# EAGLE board panel (EAGLE 9.2.2), part 1 of 2
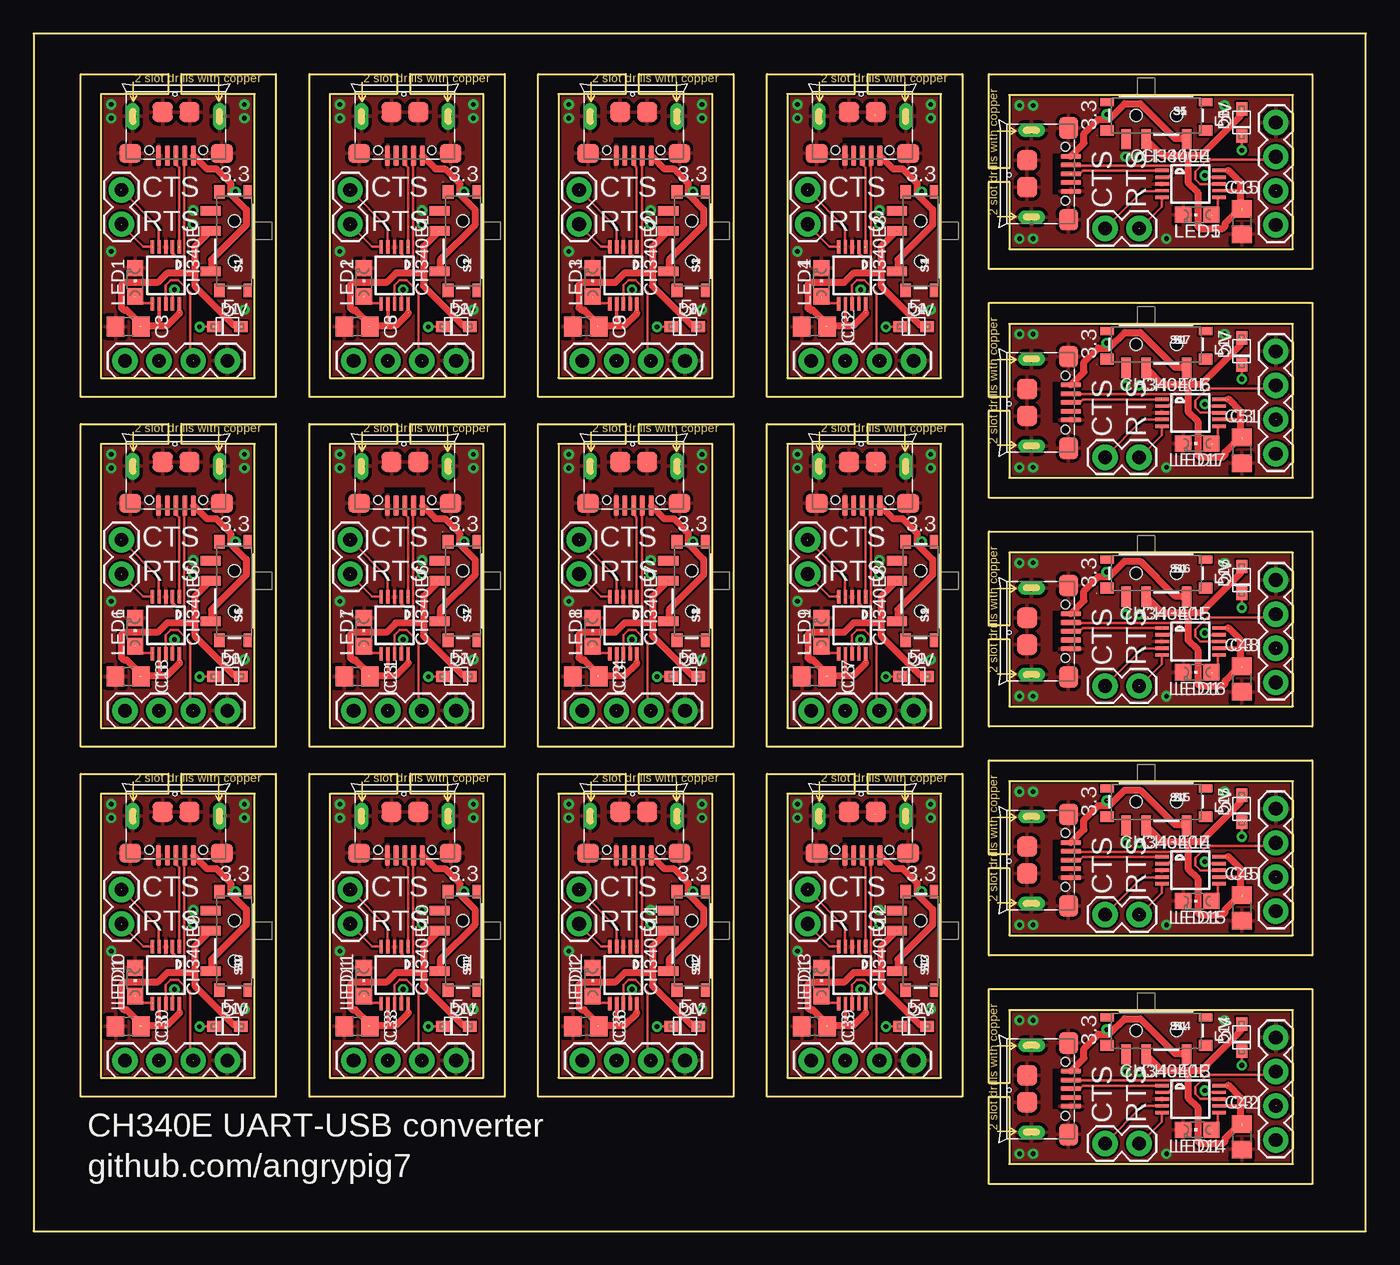
[diagram p0: board, top side]
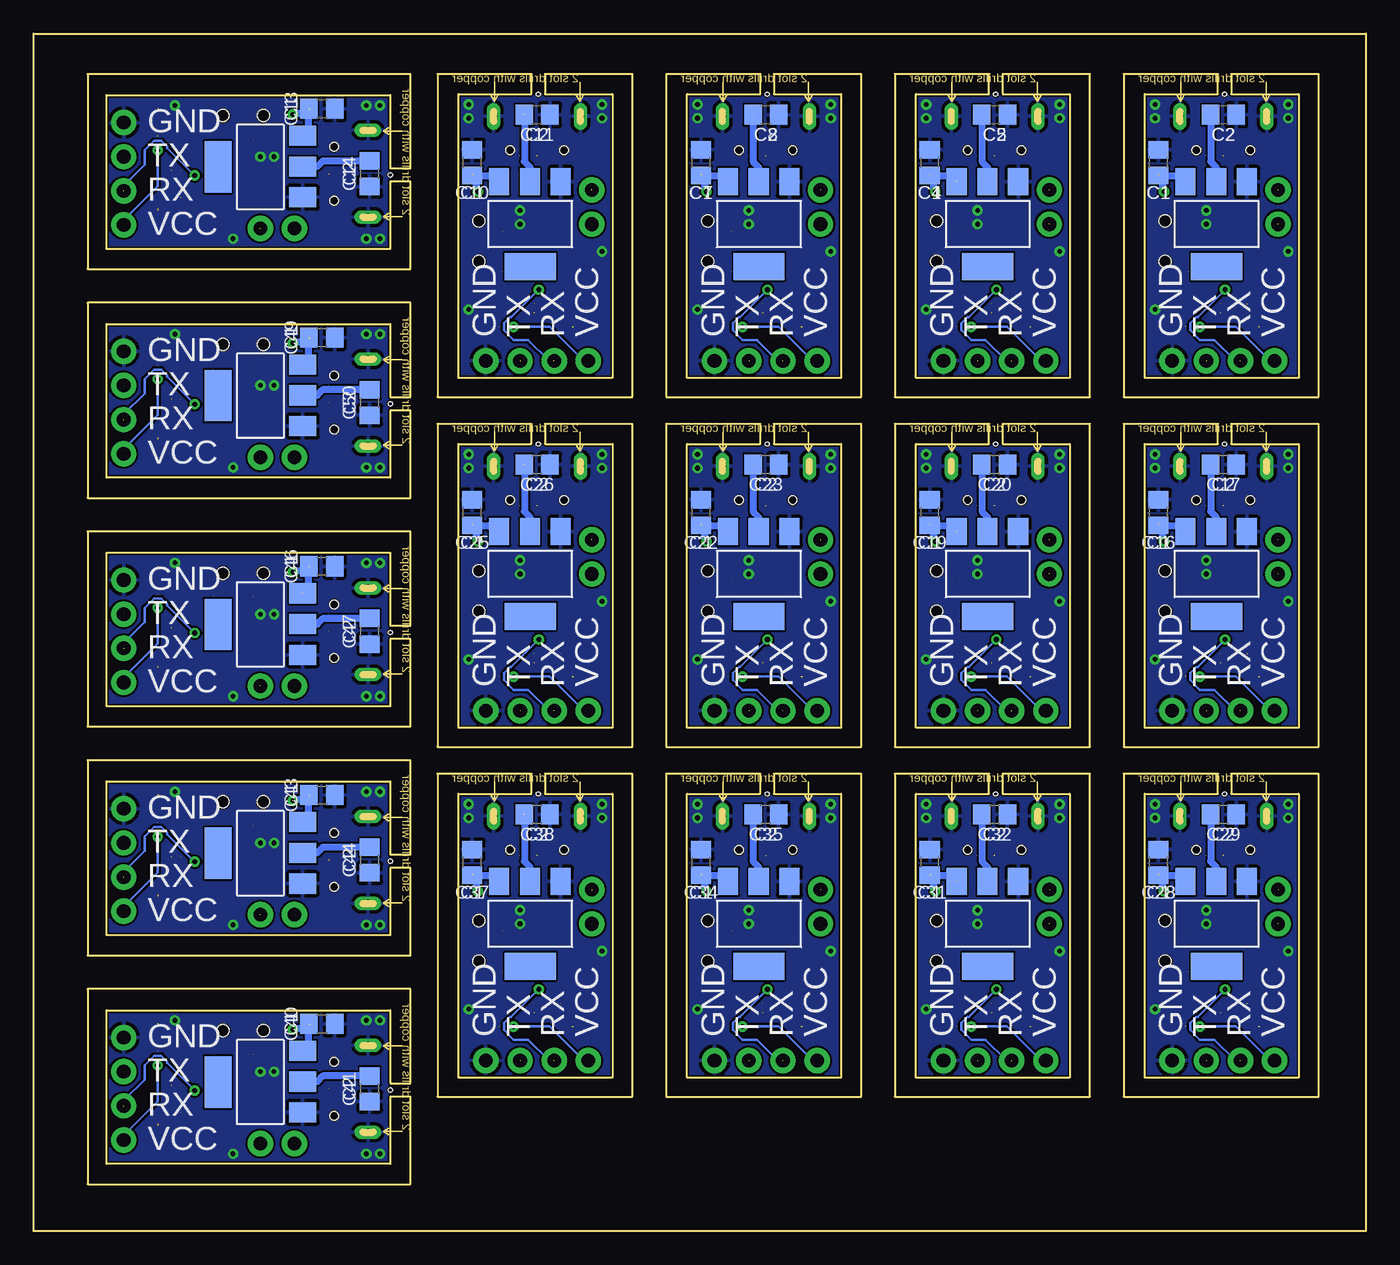
[diagram p1: board, bottom side, seen from below]

Size 99 x 89 mm. Coordinates in mm from the lower left corner, seen from the top.
Outline: 5,84.5 5,63.42 16.43,63.42 16.43,84.5 11,84.5 11,86 18,86 18,62 3.5,62 3.5,86 10,86 10,84.5 5,84.5
Outline: 0,0 99,0 99,89 0,89 0,0
Outline: 22,84.5 22,63.42 33.43,63.42 33.43,84.5 28,84.5 28,86 35,86 35,62 20.5,62 20.5,86 27,86 27,84.5 22,84.5
Outline: 39,84.5 39,63.42 50.43,63.42 50.43,84.5 45,84.5 45,86 52,86 52,62 37.5,62 37.5,86 44,86 44,84.5 39,84.5
Outline: 56,84.5 56,63.42 67.43,63.42 67.43,84.5 62,84.5 62,86 69,86 69,62 54.5,62 54.5,86 61,86 61,84.5 56,84.5
Outline: 72.5,73 93.58,73 93.58,84.43 72.5,84.43 72.5,79 71,79 71,86 95,86 95,71.5 71,71.5 71,78 72.5,78 72.5,73
Outline: 5,58.5 5,37.42 16.43,37.42 16.43,58.5 11,58.5 11,60 18,60 18,36 3.5,36 3.5,60 10,60 10,58.5 5,58.5
Outline: 22,58.5 22,37.42 33.43,37.42 33.43,58.5 28,58.5 28,60 35,60 35,36 20.5,36 20.5,60 27,60 27,58.5 22,58.5
Outline: 39,58.5 39,37.42 50.43,37.42 50.43,58.5 45,58.5 45,60 52,60 52,36 37.5,36 37.5,60 44,60 44,58.5 39,58.5
Outline: 56,58.5 56,37.42 67.43,37.42 67.43,58.5 62,58.5 62,60 69,60 69,36 54.5,36 54.5,60 61,60 61,58.5 56,58.5
Outline: 5,32.5 5,11.42 16.43,11.42 16.43,32.5 11,32.5 11,34 18,34 18,10 3.5,10 3.5,34 10,34 10,32.5 5,32.5
Outline: 22,32.5 22,11.42 33.43,11.42 33.43,32.5 28,32.5 28,34 35,34 35,10 20.5,10 20.5,34 27,34 27,32.5 22,32.5
Outline: 39,32.5 39,11.42 50.43,11.42 50.43,32.5 45,32.5 45,34 52,34 52,10 37.5,10 37.5,34 44,34 44,32.5 39,32.5
Outline: 56,32.5 56,11.42 67.43,11.42 67.43,32.5 62,32.5 62,34 69,34 69,10 54.5,10 54.5,34 61,34 61,32.5 56,32.5
Outline: 72.5,5 93.58,5 93.58,16.43 72.5,16.43 72.5,11 71,11 71,18 95,18 95,3.5 71,3.5 71,10 72.5,10 72.5,5
Outline: 72.5,22 93.58,22 93.58,33.43 72.5,33.43 72.5,28 71,28 71,35 95,35 95,20.5 71,20.5 71,27 72.5,27 72.5,22
Outline: 72.5,39 93.58,39 93.58,50.43 72.5,50.43 72.5,45 71,45 71,52 95,52 95,37.5 71,37.5 71,44 72.5,44 72.5,39
Outline: 72.5,56 93.58,56 93.58,67.43 72.5,67.43 72.5,62 71,62 71,69 95,69 95,54.5 71,54.5 71,61 72.5,61 72.5,56
Copper layers (1*16): Top 0.035mm / dielectric 1.5mm / Bottom 0.035mm
Design rules "default *": minimum track width 6mil, minimum drill 0.35mm, track to track 6mil, track to pad 6mil, pad to pad 6mil, via to via 6mil, smd to smd 6mil, copper to edge 4mil, drill to drill 6mil, minimum pad ring 10mil, minimum via ring 8mil, stop-mask expansion 4mil, vias tented up to drill 0mil, thermal gap 10mil
Net classes: 0 default: width 0.203 mm; 1 power: width 0.508 mm
Holes 0.3 mm at 10.5,84.5 27.5,84.5 44.5,84.5 61.5,84.5 72.5,78.5 10.5,58.5 27.5,58.5 44.5,58.5 61.5,58.5 10.5,32.5 27.5,32.5 44.5,32.5 61.5,32.5 72.5,10.5 72.5,27.5 72.5,44.5 72.5,61.5

## Footprints (pad centres in the part's own frame; a part is rotated, then mirrored left to right if it is on the bottom)
C0805 = smd 1.3 x 1.5: 1 -0.95,0; 2 0.95,0
MSOP10 = smd 1 x 0.25: 1 -2.113,1; 2 -2.113,0.5; 3 -2.113,0; 4 -2.113,-0.5; 5 -2.113,-1; 6 2.113,-1; 7 2.113,-0.5; 8 2.113,0; 9 2.113,0.5; 10 2.113,1
SOD-323F = smd 1 x 0.8: A -1,0; C 1,0
SOT223 = smd 1.499 x 2.007: 1 -2.261,-3.15; 2 0.025,-3.15; 3 2.311,-3.15 | smd 3.81 x 2.007: 4 0,3.15
1X04 = drill 1.016 pad 1.88: 1 0,0; 2 2.54,0; 3 5.08,0; 4 7.62,0
1X02 = drill 1.016 pad 1.88: 1 0,0; 2 2.54,0
CHIPLED_0805 = smd 1.2 x 1.2: A 0,-1.05; C 0,1.05
SWITCH_SPST_SMD_A = smd 0.7 x 1.5: 1 -2.25,-1.75; 2 -0.75,-1.75; 3 2.25,-1.75 | smd 1 x 0.6: GND1 -3.65,1; GND3 3.65,1 | smd 1 x 0.8: GND2 -3.65,-1.1; GND4 3.65,-1.1 | hole 0.9: -1.5,0; 1.5,0
MICRO-USB5+4P-SMD-0.65-B = smd 0.381 x 1.524: 1 -1.3,-0.25; 2 -0.65,-0.25; 3 0,-0.25; 4 0.65,-0.25; 5 1.3,-0.25 | smd 1.6 x 1.397: S1 -3.4,-0.427; S6 3.4,-0.427 | drill 0.508 pad 1.016 long: S2 -3.226,-3.175; S5 3.226,-3.175 | smd 1.5 x 1.5: S3 -1,-3.5; S4 1,-3.5 | hole 0.635: -2,-0.65; 2,-0.65

## Placement (x,y rotation side)
C1  100nF  [C0805]  15.41,79.42 90 bottom
C2  100nF  [C0805]  10.59,82.98 0 bottom
C3  100nF  [C0805]  7.03,67.23 180 top
C4  100nF  [C0805]  32.41,79.42 90 bottom
C5  100nF  [C0805]  27.59,82.98 0 bottom
C6  100nF  [C0805]  24.03,67.23 180 top
C7  100nF  [C0805]  49.41,79.42 90 bottom
C8  100nF  [C0805]  44.59,82.98 0 bottom
C9  100nF  [C0805]  41.03,67.23 180 top
C10  100nF  [C0805]  66.41,79.42 90 bottom
C11  100nF  [C0805]  61.59,82.98 0 bottom
C12  100nF  [C0805]  58.03,67.23 180 top
C13  100nF  [C0805]  77.58,83.41 0 bottom
C14  100nF  [C0805]  74.02,78.59 270 bottom
C15  100nF  [C0805]  89.77,75.03 270 top
C16  100nF  [C0805]  15.41,53.42 90 bottom
C17  100nF  [C0805]  10.59,56.98 0 bottom
C18  100nF  [C0805]  7.03,41.23 180 top
C19  100nF  [C0805]  32.41,53.42 90 bottom
C20  100nF  [C0805]  27.59,56.98 0 bottom
C21  100nF  [C0805]  24.03,41.23 180 top
C22  100nF  [C0805]  49.41,53.42 90 bottom
C23  100nF  [C0805]  44.59,56.98 0 bottom
C24  100nF  [C0805]  41.03,41.23 180 top
C25  100nF  [C0805]  66.41,53.42 90 bottom
C26  100nF  [C0805]  61.59,56.98 0 bottom
C27  100nF  [C0805]  58.03,41.23 180 top
C28  100nF  [C0805]  15.41,27.42 90 bottom
C29  100nF  [C0805]  10.59,30.98 0 bottom
C30  100nF  [C0805]  7.03,15.23 180 top
C31  100nF  [C0805]  32.41,27.42 90 bottom
C32  100nF  [C0805]  27.59,30.98 0 bottom
C33  100nF  [C0805]  24.03,15.23 180 top
C34  100nF  [C0805]  49.41,27.42 90 bottom
C35  100nF  [C0805]  44.59,30.98 0 bottom
C36  100nF  [C0805]  41.03,15.23 180 top
C37  100nF  [C0805]  66.41,27.42 90 bottom
C38  100nF  [C0805]  61.59,30.98 0 bottom
C39  100nF  [C0805]  58.03,15.23 180 top
C40  100nF  [C0805]  77.58,15.41 0 bottom
C41  100nF  [C0805]  74.02,10.59 270 bottom
C42  100nF  [C0805]  89.77,7.03 270 top
C43  100nF  [C0805]  77.58,32.41 0 bottom
C44  100nF  [C0805]  74.02,27.59 270 bottom
C45  100nF  [C0805]  89.77,24.03 270 top
C46  100nF  [C0805]  77.58,49.41 0 bottom
C47  100nF  [C0805]  74.02,44.59 270 bottom
C48  100nF  [C0805]  89.77,41.03 270 top
C49  100nF  [C0805]  77.58,66.41 0 bottom
C50  100nF  [C0805]  74.02,61.59 270 bottom
C51  100nF  [C0805]  89.77,58.03 270 top
CH340E  CH340ESMD  [MSOP10]  9.83,71.04 270 top
CH340E1  CH340ESMD  [MSOP10]  26.83,71.04 270 top
CH340E2  CH340ESMD  [MSOP10]  43.83,71.04 270 top
CH340E3  CH340ESMD  [MSOP10]  60.83,71.04 270 top
CH340E4  CH340ESMD  [MSOP10]  85.96,77.83 0 top
CH340E5  CH340ESMD  [MSOP10]  9.83,45.04 270 top
CH340E6  CH340ESMD  [MSOP10]  26.83,45.04 270 top
CH340E7  CH340ESMD  [MSOP10]  43.83,45.04 270 top
CH340E8  CH340ESMD  [MSOP10]  60.83,45.04 270 top
CH340E9  CH340ESMD  [MSOP10]  9.83,19.04 270 top
CH340E10  CH340ESMD  [MSOP10]  26.83,19.04 270 top
CH340E11  CH340ESMD  [MSOP10]  43.83,19.04 270 top
CH340E12  CH340ESMD  [MSOP10]  60.83,19.04 270 top
CH340E13  CH340ESMD  [MSOP10]  85.96,9.83 0 top
CH340E14  CH340ESMD  [MSOP10]  85.96,26.83 0 top
CH340E15  CH340ESMD  [MSOP10]  85.96,43.83 0 top
CH340E16  CH340ESMD  [MSOP10]  85.96,60.83 0 top
D1  [SOD-323F]  14.4,67.23 180 top
D2  [SOD-323F]  31.4,67.23 180 top
D3  [SOD-323F]  48.4,67.23 180 top
D4  [SOD-323F]  65.4,67.23 180 top
D5  [SOD-323F]  89.77,82.4 270 top
D6  [SOD-323F]  14.4,41.23 180 top
D7  [SOD-323F]  31.4,41.23 180 top
D8  [SOD-323F]  48.4,41.23 180 top
D9  [SOD-323F]  65.4,41.23 180 top
D10  [SOD-323F]  14.4,15.23 180 top
D11  [SOD-323F]  31.4,15.23 180 top
D12  [SOD-323F]  48.4,15.23 180 top
D13  [SOD-323F]  65.4,15.23 180 top
D14  [SOD-323F]  89.77,14.4 270 top
D15  [SOD-323F]  89.77,31.4 270 top
D16  [SOD-323F]  89.77,48.4 270 top
D17  [SOD-323F]  89.77,65.4 270 top
IC1  REG1117  [SOT223]  11.1,74.85 180 bottom
IC2  REG1117  [SOT223]  28.1,74.85 180 bottom
IC3  REG1117  [SOT223]  45.1,74.85 180 bottom
IC4  REG1117  [SOT223]  62.1,74.85 180 bottom
IC5  REG1117  [SOT223]  82.15,79.1 90 bottom
IC6  REG1117  [SOT223]  11.1,48.85 180 bottom
IC7  REG1117  [SOT223]  28.1,48.85 180 bottom
IC8  REG1117  [SOT223]  45.1,48.85 180 bottom
IC9  REG1117  [SOT223]  62.1,48.85 180 bottom
IC10  REG1117  [SOT223]  11.1,22.85 180 bottom
IC11  REG1117  [SOT223]  28.1,22.85 180 bottom
IC12  REG1117  [SOT223]  45.1,22.85 180 bottom
IC13  REG1117  [SOT223]  62.1,22.85 180 bottom
IC14  REG1117  [SOT223]  82.15,11.1 90 bottom
IC15  REG1117  [SOT223]  82.15,28.1 90 bottom
IC16  REG1117  [SOT223]  82.15,45.1 90 bottom
IC17  REG1117  [SOT223]  82.15,62.1 90 bottom
J1  [1X04]  6.78,64.69 0 top
J2  [1X02]  6.52,74.85 90 top
J3  [1X04]  23.78,64.69 0 top
J4  [1X02]  23.52,74.85 90 top
J5  [1X04]  40.78,64.69 0 top
J6  [1X02]  40.52,74.85 90 top
J7  [1X04]  57.78,64.69 0 top
J8  [1X02]  57.52,74.85 90 top
J9  [1X04]  92.31,74.78 90 top
J10  [1X02]  82.15,74.52 180 top
J11  [1X04]  6.78,38.69 0 top
J12  [1X02]  6.52,48.85 90 top
J13  [1X04]  23.78,38.69 0 top
J14  [1X02]  23.52,48.85 90 top
J15  [1X04]  40.78,38.69 0 top
J16  [1X02]  40.52,48.85 90 top
J17  [1X04]  57.78,38.69 0 top
J18  [1X02]  57.52,48.85 90 top
J19  [1X04]  6.78,12.69 0 top
J20  [1X02]  6.52,22.85 90 top
J21  [1X04]  23.78,12.69 0 top
J22  [1X02]  23.52,22.85 90 top
J23  [1X04]  40.78,12.69 0 top
J24  [1X02]  40.52,22.85 90 top
J25  [1X04]  57.78,12.69 0 top
J26  [1X02]  57.52,22.85 90 top
J27  [1X04]  92.31,6.78 90 top
J28  [1X02]  82.15,6.52 180 top
J29  [1X04]  92.31,23.78 90 top
J30  [1X02]  82.15,23.52 180 top
J31  [1X04]  92.31,40.78 90 top
J32  [1X02]  82.15,40.52 180 top
J33  [1X04]  92.31,57.78 90 top
J34  [1X02]  82.15,57.52 180 top
LED1  [CHIPLED_0805]  7.54,70.53 0 top
LED2  [CHIPLED_0805]  24.54,70.53 0 top
LED3  [CHIPLED_0805]  41.54,70.53 0 top
LED4  [CHIPLED_0805]  58.54,70.53 0 top
LED5  [CHIPLED_0805]  86.47,75.54 90 top
LED6  [CHIPLED_0805]  7.54,44.53 0 top
LED7  [CHIPLED_0805]  24.54,44.53 0 top
LED8  [CHIPLED_0805]  41.54,44.53 0 top
LED9  [CHIPLED_0805]  58.54,44.53 0 top
LED10  [CHIPLED_0805]  7.54,18.53 0 top
LED11  [CHIPLED_0805]  24.54,18.53 0 top
LED12  [CHIPLED_0805]  41.54,18.53 0 top
LED13  [CHIPLED_0805]  58.54,18.53 0 top
LED14  [CHIPLED_0805]  86.47,7.54 90 top
LED15  [CHIPLED_0805]  86.47,24.54 90 top
LED16  [CHIPLED_0805]  86.47,41.54 90 top
LED17  [CHIPLED_0805]  86.47,58.54 90 top
S1  [SWITCH_SPST_SMD_A]  14.91,73.58 270 top
S2  [SWITCH_SPST_SMD_A]  31.91,73.58 270 top
S3  [SWITCH_SPST_SMD_A]  48.91,73.58 270 top
S4  [SWITCH_SPST_SMD_A]  65.91,73.58 270 top
S5  [SWITCH_SPST_SMD_A]  83.42,82.91 0 top
S6  [SWITCH_SPST_SMD_A]  14.91,47.58 270 top
S7  [SWITCH_SPST_SMD_A]  31.91,47.58 270 top
S8  [SWITCH_SPST_SMD_A]  48.91,47.58 270 top
S9  [SWITCH_SPST_SMD_A]  65.91,47.58 270 top
S10  [SWITCH_SPST_SMD_A]  14.91,21.58 270 top
S11  [SWITCH_SPST_SMD_A]  31.91,21.58 270 top
S12  [SWITCH_SPST_SMD_A]  48.91,21.58 270 top
S13  [SWITCH_SPST_SMD_A]  65.91,21.58 270 top
S14  [SWITCH_SPST_SMD_A]  83.42,14.91 0 top
S15  [SWITCH_SPST_SMD_A]  83.42,31.91 0 top
S16  [SWITCH_SPST_SMD_A]  83.42,48.91 0 top
S17  [SWITCH_SPST_SMD_A]  83.42,65.91 0 top
USB1  ST-USB-001G  [MICRO-USB5+4P-SMD-0.65-B]  27.59,79.67 180 top
USB2  ST-USB-001G  [MICRO-USB5+4P-SMD-0.65-B]  10.59,79.67 180 top
USB3  ST-USB-001G  [MICRO-USB5+4P-SMD-0.65-B]  44.59,79.67 180 top
USB4  ST-USB-001G  [MICRO-USB5+4P-SMD-0.65-B]  61.59,79.67 180 top
USB5  ST-USB-001G  [MICRO-USB5+4P-SMD-0.65-B]  77.33,78.59 270 top
USB6  ST-USB-001G  [MICRO-USB5+4P-SMD-0.65-B]  10.59,53.67 180 top
USB7  ST-USB-001G  [MICRO-USB5+4P-SMD-0.65-B]  27.59,53.67 180 top
USB8  ST-USB-001G  [MICRO-USB5+4P-SMD-0.65-B]  44.59,53.67 180 top
USB9  ST-USB-001G  [MICRO-USB5+4P-SMD-0.65-B]  61.59,53.67 180 top
USB10  ST-USB-001G  [MICRO-USB5+4P-SMD-0.65-B]  10.59,27.67 180 top
USB11  ST-USB-001G  [MICRO-USB5+4P-SMD-0.65-B]  27.59,27.67 180 top
USB12  ST-USB-001G  [MICRO-USB5+4P-SMD-0.65-B]  44.59,27.67 180 top
USB13  ST-USB-001G  [MICRO-USB5+4P-SMD-0.65-B]  61.59,27.67 180 top
USB14  ST-USB-001G  [MICRO-USB5+4P-SMD-0.65-B]  77.33,10.59 270 top
USB15  ST-USB-001G  [MICRO-USB5+4P-SMD-0.65-B]  77.33,27.59 270 top
USB16  ST-USB-001G  [MICRO-USB5+4P-SMD-0.65-B]  77.33,44.59 270 top
USB17  ST-USB-001G  [MICRO-USB5+4P-SMD-0.65-B]  77.33,61.59 270 top

## Library data of the parts
C1-C51 = rcl-2
CH340E CH340E1-CH340E16 = CH340E
D1-D17 LED1-LED17 = adafruit
IC1-IC17 = burr-brown-3
J1 J3 J5 J7 J9 J11 J13 J15 J17 J19 J21 J23 J25 J27 J29 J31 J33 = SparkFun-Connectors; PROD_ID: CONN-09696
J2 J4 J6 J8 J10 J12 J14 J16 J18 J20 J22 J24 J26 J28 J30 J32 J34 = SparkFun-Connectors
S1-S17 = SparkFun-Switches; PROD_ID: SWCH-10651; SF_SKU: COM-10860
USB1-USB17 = Seeed-Connector; MPN: ST-USB-001G

## Nets
3.3V [power]: S1.1
3.3V1 [power]: S2.1
3.3V2 [power]: S3.1
3.3V3 [power]: S4.1
3.3V4 [power]: S5.1
3.3V5 [power]: S6.1
3.3V6 [power]: S7.1
3.3V7 [power]: S8.1
3.3V8 [power]: S9.1
3.3V9 [power]: S10.1
3.3V10 [power]: S11.1
3.3V11 [power]: S12.1
3.3V12 [power]: S13.1
3.3V13 [power]: S14.1
3.3V14 [power]: S15.1
3.3V15 [power]: S16.1
3.3V16 [power]: S17.1
3V1 [power]: C5.1 IC2.2
3V2 [power]: C8.1 IC3.2
3V3 [power]: C2.1 IC1.2
3V4 [power]: C11.1 IC4.2
3V5 [power]: C14.1 IC5.2
3V6 [power]: C17.1 IC6.2
3V7 [power]: C20.1 IC7.2
3V8 [power]: C23.1 IC8.2
3V9 [power]: C26.1 IC9.2
3V10 [power]: C29.1 IC10.2
3V11 [power]: C32.1 IC11.2
3V12 [power]: C35.1 IC12.2
3V13 [power]: C38.1 IC13.2
3V14 [power]: C41.1 IC14.2
3V15 [power]: C44.1 IC15.2
3V16 [power]: C47.1 IC16.2
3V17 [power]: C50.1 IC17.2
5V [power]: C1.1 IC1.3 S1.3 USB2.1
5V1 [power]: C4.1 IC2.3 S2.3 USB1.1
5V2 [power]: C7.1 IC3.3 S3.3 USB3.1
5V3 [power]: C10.1 IC4.3 S4.3 USB4.1
5V4 [power]: C13.1 IC5.3 S5.3 USB5.1
5V5 [power]: C16.1 IC6.3 S6.3 USB6.1
5V6 [power]: C19.1 IC7.3 S7.3 USB7.1
5V7 [power]: C22.1 IC8.3 S8.3 USB8.1
5V8 [power]: C25.1 IC9.3 S9.3 USB9.1
5V9 [power]: C28.1 IC10.3 S10.3 USB10.1
5V10 [power]: C31.1 IC11.3 S11.3 USB11.1
5V11 [power]: C34.1 IC12.3 S12.3 USB12.1
5V12 [power]: C37.1 IC13.3 S13.3 USB13.1
5V13 [power]: C40.1 IC14.3 S14.3 USB14.1
5V14 [power]: C43.1 IC15.3 S15.3 USB15.1
5V15 [power]: C46.1 IC16.3 S16.3 USB16.1
5V16 [power]: C49.1 IC17.3 S17.3 USB17.1
CTS: CH340E.5 J2.1
CTS1: CH340E1.5 J4.1
CTS2: CH340E2.5 J6.1
CTS3: CH340E3.5 J8.1
CTS4: CH340E4.5 J10.1
CTS5: CH340E5.5 J12.1
CTS6: CH340E6.5 J14.1
CTS7: CH340E7.5 J16.1
CTS8: CH340E8.5 J18.1
CTS9: CH340E9.5 J20.1
CTS10: CH340E10.5 J22.1
CTS11: CH340E11.5 J24.1
CTS12: CH340E12.5 J26.1
CTS13: CH340E13.5 J28.1
CTS14: CH340E14.5 J30.1
CTS15: CH340E15.5 J32.1
CTS16: CH340E16.5 J34.1
GND [power]: C1.2 C2.2 C3.2 CH340E.3 IC1.1 J1.4 LED1.C USB2.5 USB2.S1 USB2.S2 USB2.S3 USB2.S4 USB2.S5 USB2.S6
GND1 [power]: C4.2 C5.2 C6.2 CH340E1.3 IC2.1 J3.4 LED2.C USB1.5 USB1.S1 USB1.S2 USB1.S3 USB1.S4 USB1.S5 USB1.S6
GND2 [power]: C7.2 C8.2 C9.2 CH340E2.3 IC3.1 J5.4 LED3.C USB3.5 USB3.S1 USB3.S2 USB3.S3 USB3.S4 USB3.S5 USB3.S6
GND3 [power]: C10.2 C11.2 C12.2 CH340E3.3 IC4.1 J7.4 LED4.C USB4.5 USB4.S1 USB4.S2 USB4.S3 USB4.S4 USB4.S5 USB4.S6
GND4 [power]: C13.2 C14.2 C15.2 CH340E4.3 IC5.1 J9.4 LED5.C USB5.5 USB5.S1 USB5.S2 USB5.S3 USB5.S4 USB5.S5 USB5.S6
GND5 [power]: C16.2 C17.2 C18.2 CH340E5.3 IC6.1 J11.4 LED6.C USB6.5 USB6.S1 USB6.S2 USB6.S3 USB6.S4 USB6.S5 USB6.S6
GND6 [power]: C19.2 C20.2 C21.2 CH340E6.3 IC7.1 J13.4 LED7.C USB7.5 USB7.S1 USB7.S2 USB7.S3 USB7.S4 USB7.S5 USB7.S6
GND7 [power]: C22.2 C23.2 C24.2 CH340E7.3 IC8.1 J15.4 LED8.C USB8.5 USB8.S1 USB8.S2 USB8.S3 USB8.S4 USB8.S5 USB8.S6
GND8 [power]: C25.2 C26.2 C27.2 CH340E8.3 IC9.1 J17.4 LED9.C USB9.5 USB9.S1 USB9.S2 USB9.S3 USB9.S4 USB9.S5 USB9.S6
GND9 [power]: C28.2 C29.2 C30.2 CH340E9.3 IC10.1 J19.4 LED10.C USB10.5 USB10.S1 USB10.S2 USB10.S3 USB10.S4 USB10.S5 USB10.S6
GND10 [power]: C31.2 C32.2 C33.2 CH340E10.3 IC11.1 J21.4 LED11.C USB11.5 USB11.S1 USB11.S2 USB11.S3 USB11.S4 USB11.S5 USB11.S6
GND11 [power]: C34.2 C35.2 C36.2 CH340E11.3 IC12.1 J23.4 LED12.C USB12.5 USB12.S1 USB12.S2 USB12.S3 USB12.S4 USB12.S5 USB12.S6
GND12 [power]: C37.2 C38.2 C39.2 CH340E12.3 IC13.1 J25.4 LED13.C USB13.5 USB13.S1 USB13.S2 USB13.S3 USB13.S4 USB13.S5 USB13.S6
GND13 [power]: C40.2 C41.2 C42.2 CH340E13.3 IC14.1 J27.4 LED14.C USB14.5 USB14.S1 USB14.S2 USB14.S3 USB14.S4 USB14.S5 USB14.S6
GND14 [power]: C43.2 C44.2 C45.2 CH340E14.3 IC15.1 J29.4 LED15.C USB15.5 USB15.S1 USB15.S2 USB15.S3 USB15.S4 USB15.S5 USB15.S6
GND15 [power]: C46.2 C47.2 C48.2 CH340E15.3 IC16.1 J31.4 LED16.C USB16.5 USB16.S1 USB16.S2 USB16.S3 USB16.S4 USB16.S5 USB16.S6
GND16 [power]: C49.2 C50.2 C51.2 CH340E16.3 IC17.1 J33.4 LED17.C USB17.5 USB17.S1 USB17.S2 USB17.S3 USB17.S4 USB17.S5 USB17.S6
N$1: CH340E.6 LED1.A
N$2: CH340E1.6 LED2.A
N$3: CH340E2.6 LED3.A
N$4: CH340E3.6 LED4.A
N$5: CH340E4.6 LED5.A
N$6: CH340E5.6 LED6.A
N$7: CH340E6.6 LED7.A
N$8: CH340E7.6 LED8.A
N$9: CH340E8.6 LED9.A
N$10: CH340E9.6 LED10.A
N$11: CH340E10.6 LED11.A
N$12: CH340E11.6 LED12.A
N$13: CH340E12.6 LED13.A
N$14: CH340E13.6 LED14.A
N$15: CH340E14.6 LED15.A
N$16: CH340E15.6 LED16.A
N$17: CH340E16.6 LED17.A
RTS: CH340E.4 J2.2
RTS1: CH340E1.4 J4.2
RTS2: CH340E2.4 J6.2
RTS3: CH340E3.4 J8.2
RTS4: CH340E4.4 J10.2
RTS5: CH340E5.4 J12.2
RTS6: CH340E6.4 J14.2
RTS7: CH340E7.4 J16.2
RTS8: CH340E8.4 J18.2
RTS9: CH340E9.4 J20.2
RTS10: CH340E10.4 J22.2
RTS11: CH340E11.4 J24.2
RTS12: CH340E12.4 J26.2
RTS13: CH340E13.4 J28.2
RTS14: CH340E14.4 J30.2
RTS15: CH340E15.4 J32.2
RTS16: CH340E16.4 J34.2
RX: CH340E.9 J1.2
RX1: CH340E1.9 J3.2
RX2: CH340E2.9 J5.2
RX3: CH340E3.9 J7.2
RX4: CH340E4.9 J9.2
RX5: CH340E5.9 J11.2
RX6: CH340E6.9 J13.2
RX7: CH340E7.9 J15.2
RX8: CH340E8.9 J17.2
RX9: CH340E9.9 J19.2
RX10: CH340E10.9 J21.2
RX11: CH340E11.9 J23.2
RX12: CH340E12.9 J25.2
RX13: CH340E13.9 J27.2
RX14: CH340E14.9 J29.2
RX15: CH340E15.9 J31.2
RX16: CH340E16.9 J33.2
TX: CH340E.8 J1.3
TX1: CH340E1.8 J3.3
TX2: CH340E2.8 J5.3
TX3: CH340E3.8 J7.3
TX4: CH340E4.8 J9.3
TX5: CH340E5.8 J11.3
TX6: CH340E6.8 J13.3
TX7: CH340E7.8 J15.3
TX8: CH340E8.8 J17.3
TX9: CH340E9.8 J19.3
TX10: CH340E10.8 J21.3
TX11: CH340E11.8 J23.3
TX12: CH340E12.8 J25.3
TX13: CH340E13.8 J27.3
TX14: CH340E14.8 J29.3
TX15: CH340E15.8 J31.3
TX16: CH340E16.8 J33.3
USBN: CH340E.2 USB2.2
USBN1: CH340E1.2 USB1.2
USBN2: CH340E2.2 USB3.2
USBN3: CH340E3.2 USB4.2
USBN4: CH340E4.2 USB5.2
USBN5: CH340E5.2 USB6.2
USBN6: CH340E6.2 USB7.2
USBN7: CH340E7.2 USB8.2
USBN8: CH340E8.2 USB9.2
USBN9: CH340E9.2 USB10.2
USBN10: CH340E10.2 USB11.2
USBN11: CH340E11.2 USB12.2
USBN12: CH340E12.2 USB13.2
USBN13: CH340E13.2 USB14.2
USBN14: CH340E14.2 USB15.2
USBN15: CH340E15.2 USB16.2
USBN16: CH340E16.2 USB17.2
USBP: CH340E.1 USB2.3
USBP1: CH340E1.1 USB1.3
USBP2: CH340E2.1 USB3.3
USBP3: CH340E3.1 USB4.3
USBP4: CH340E4.1 USB5.3
USBP5: CH340E5.1 USB6.3
USBP6: CH340E6.1 USB7.3
USBP7: CH340E7.1 USB8.3
USBP8: CH340E8.1 USB9.3
USBP9: CH340E9.1 USB10.3
USBP10: CH340E10.1 USB11.3
USBP11: CH340E11.1 USB12.3
USBP12: CH340E12.1 USB13.3
USBP13: CH340E13.1 USB14.3
USBP14: CH340E14.1 USB15.3
USBP15: CH340E15.1 USB16.3
USBP16: CH340E16.1 USB17.3
VCC [power]: C3.1 CH340E.7 CH340E.10 D1.A S1.2
VCC1 [power]: C6.1 CH340E1.7 CH340E1.10 D2.A S2.2
VCC2 [power]: C9.1 CH340E2.7 CH340E2.10 D3.A S3.2
VCC3 [power]: C12.1 CH340E3.7 CH340E3.10 D4.A S4.2
VCC4 [power]: C15.1 CH340E4.7 CH340E4.10 D5.A S5.2
VCC5 [power]: C18.1 CH340E5.7 CH340E5.10 D6.A S6.2
VCC6 [power]: C21.1 CH340E6.7 CH340E6.10 D7.A S7.2
VCC7 [power]: C24.1 CH340E7.7 CH340E7.10 D8.A S8.2
VCC8 [power]: C27.1 CH340E8.7 CH340E8.10 D9.A S9.2
VCC9 [power]: C30.1 CH340E9.7 CH340E9.10 D10.A S10.2
VCC10 [power]: C33.1 CH340E10.7 CH340E10.10 D11.A S11.2
VCC11 [power]: C36.1 CH340E11.7 CH340E11.10 D12.A S12.2
VCC12 [power]: C39.1 CH340E12.7 CH340E12.10 D13.A S13.2
VCC13 [power]: C42.1 CH340E13.7 CH340E13.10 D14.A S14.2
VCC14 [power]: C45.1 CH340E14.7 CH340E14.10 D15.A S15.2
VCC15 [power]: C48.1 CH340E15.7 CH340E15.10 D16.A S16.2
VCC16 [power]: C51.1 CH340E16.7 CH340E16.10 D17.A S17.2
VCC_D: D1.C J1.1
VCC_D1: D2.C J3.1
VCC_D2: D3.C J5.1
VCC_D3: D4.C J7.1
VCC_D4: D5.C J9.1
VCC_D5: D6.C J11.1
VCC_D6: D7.C J13.1
VCC_D7: D8.C J15.1
VCC_D8: D9.C J17.1
VCC_D9: D10.C J19.1
VCC_D10: D11.C J21.1
VCC_D11: D12.C J23.1
VCC_D12: D13.C J25.1
VCC_D13: D14.C J27.1
VCC_D14: D15.C J29.1
VCC_D15: D16.C J31.1
VCC_D16: D17.C J33.1